# Altium PCB PCB1.PcbDoc
Units mm, origin at the board's own origin, x right, y up, seen from the top; angles counter-clockwise.
Board outline 82.4 x 82.4 mm, 2 copper layers (Top Layer, Bottom Layer); 55 components, 37 nets, 188 pads, 11 vias.
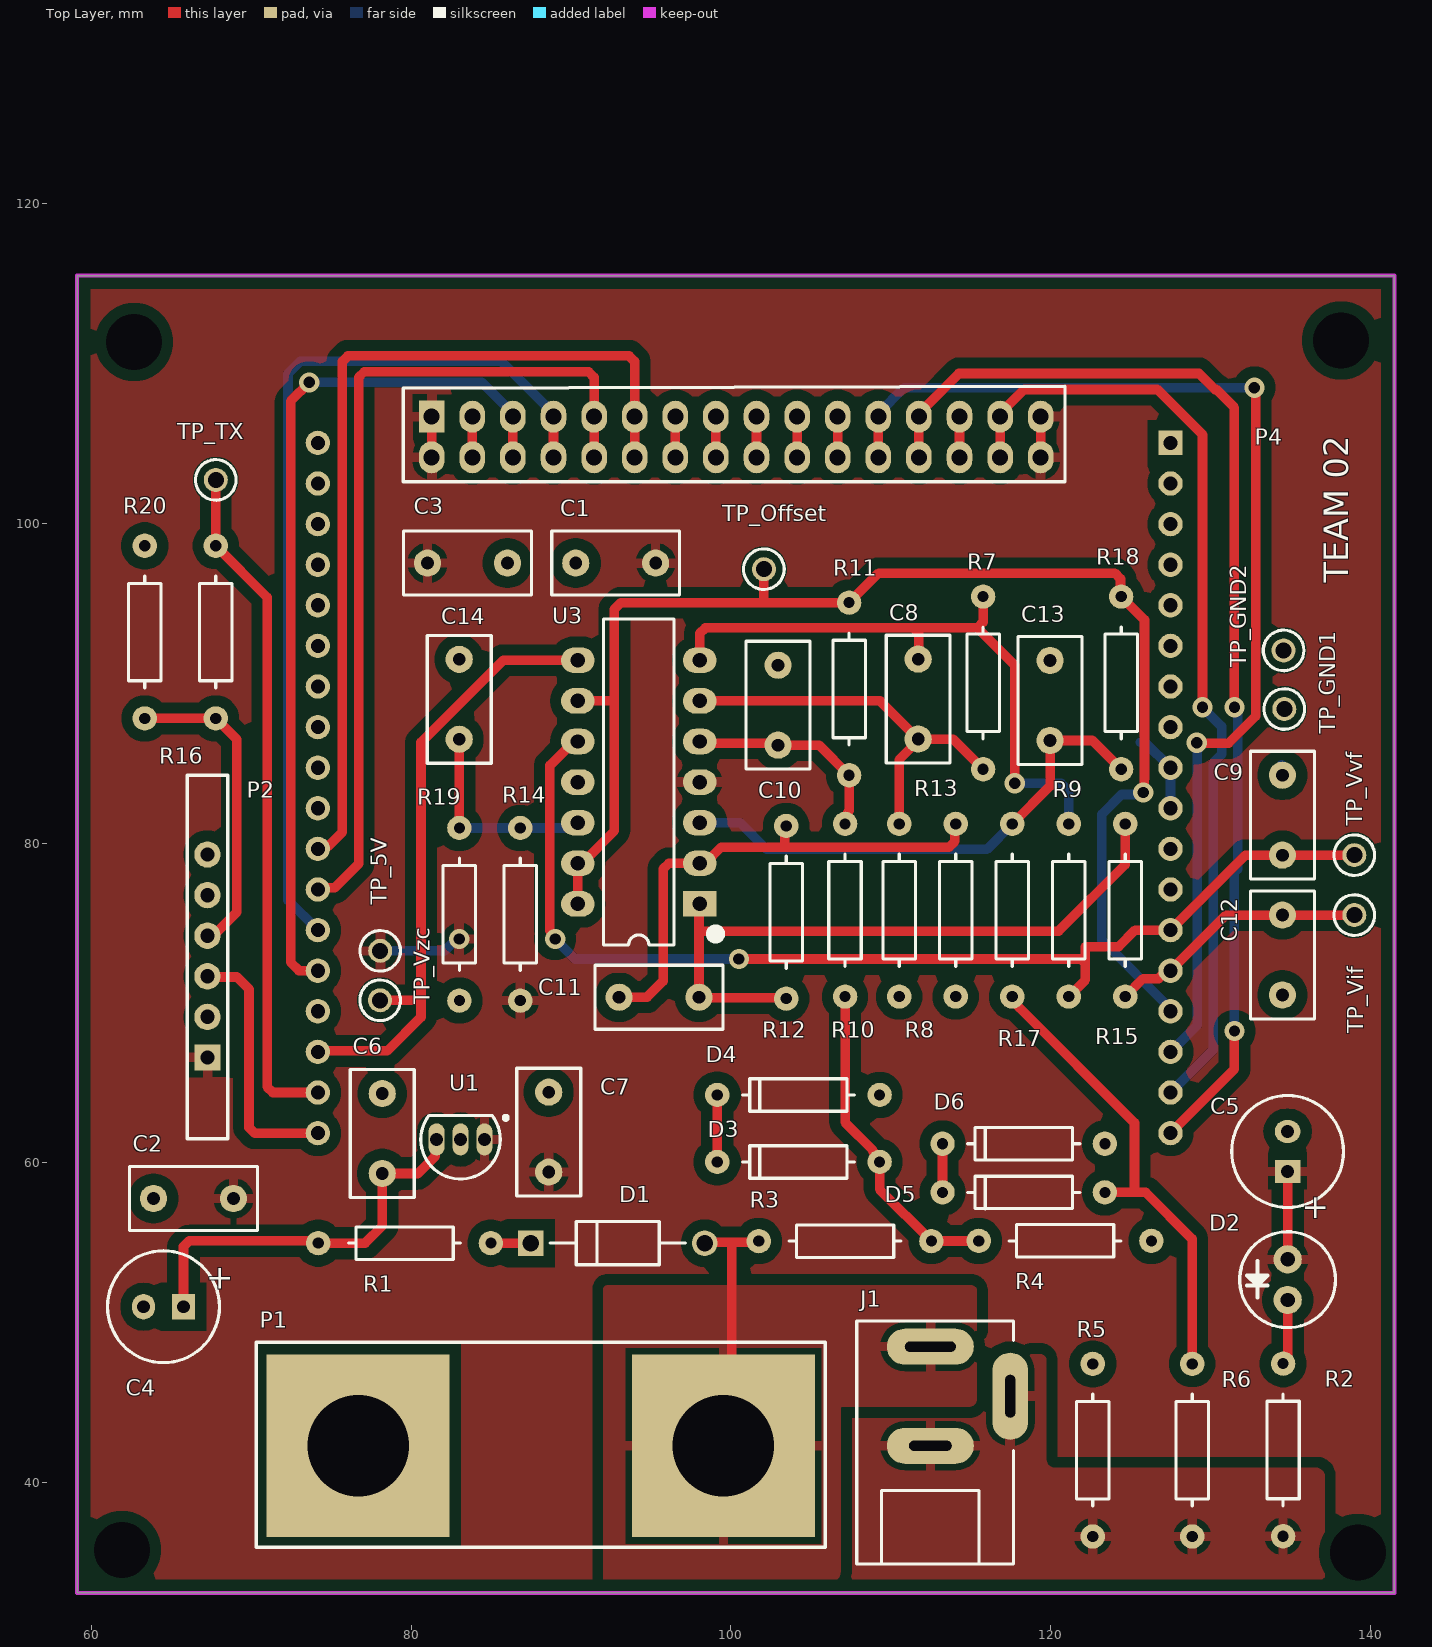
[diagram p0: Top Layer view]
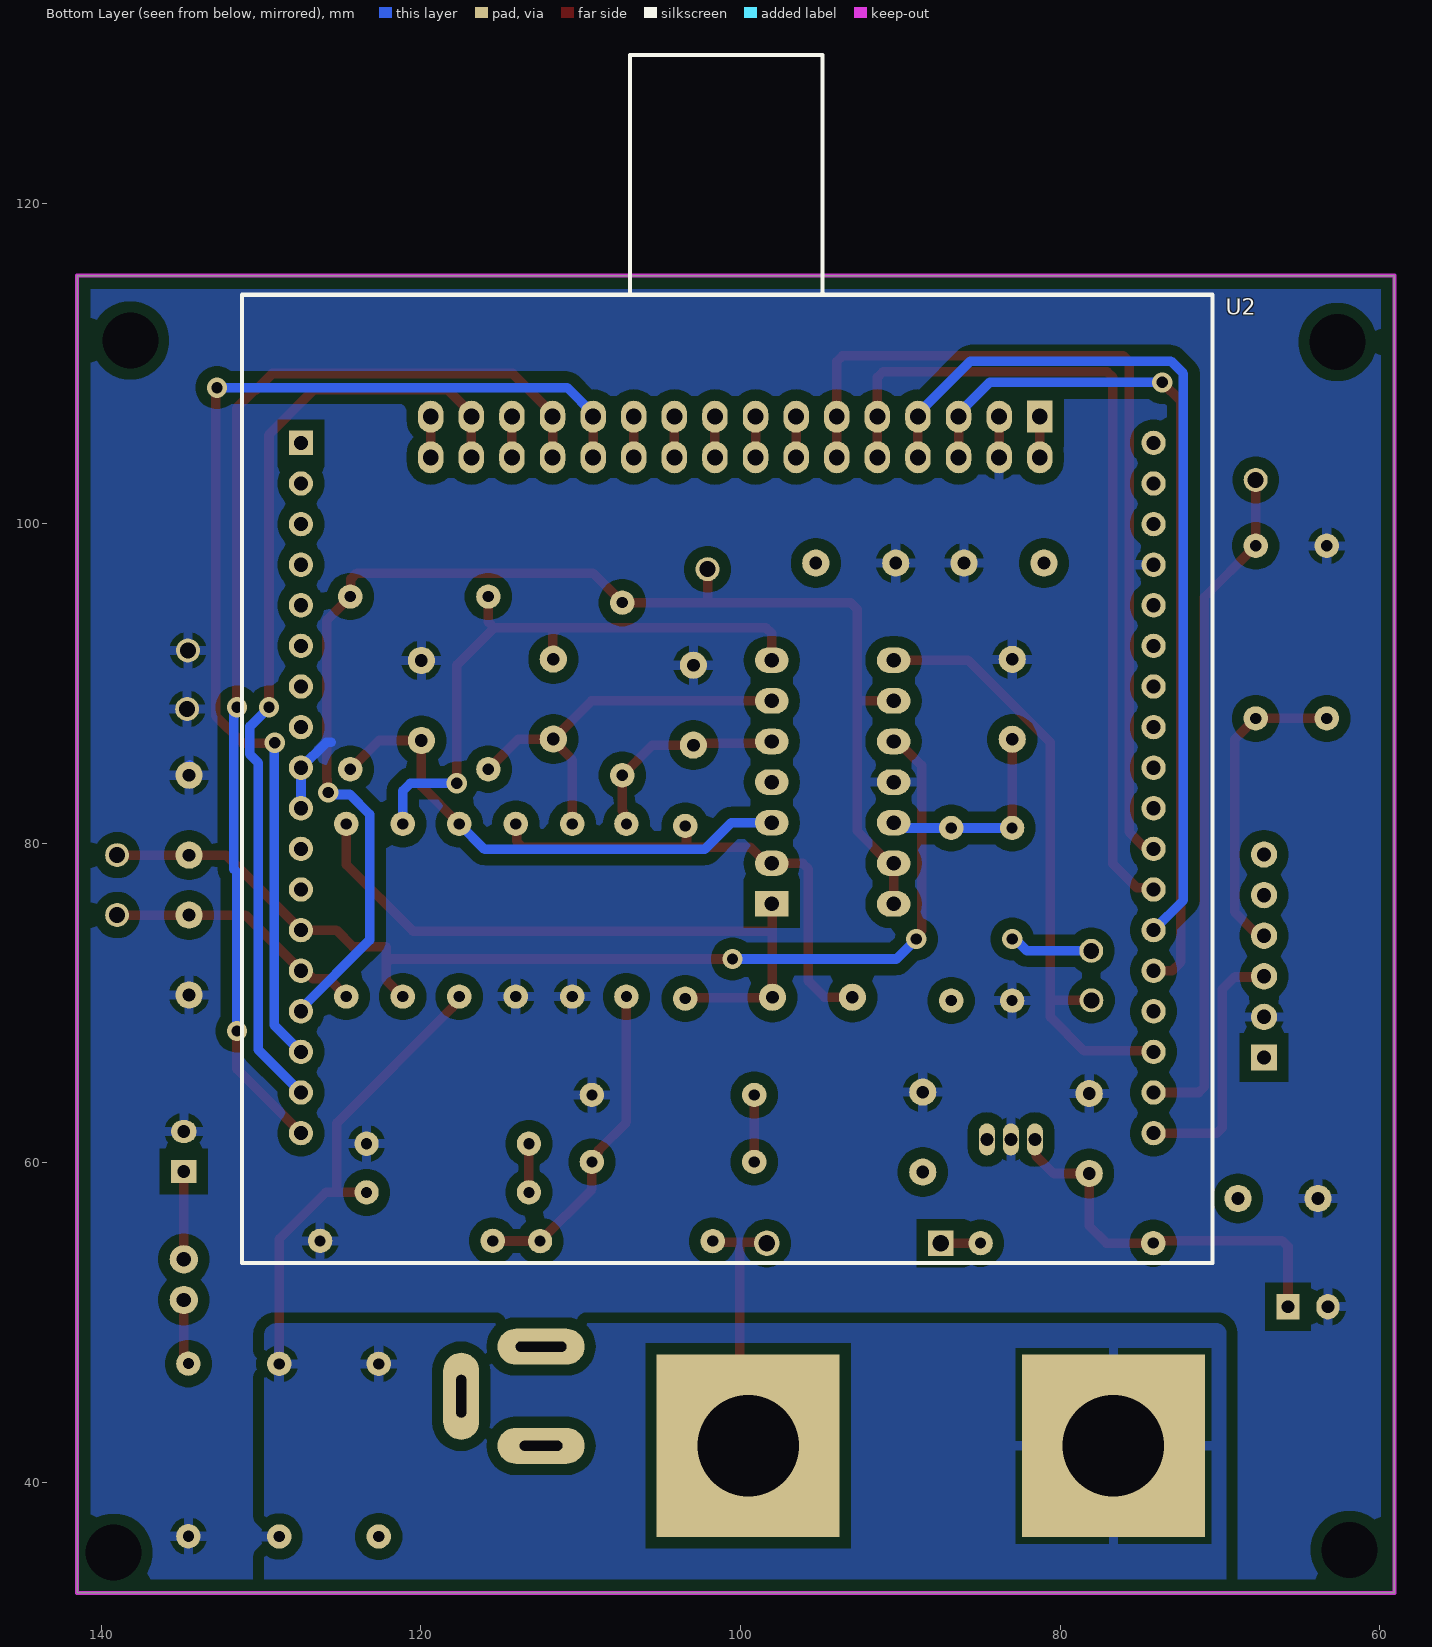
[diagram p1: Bottom Layer view, seen from below]

## Layer stack, top to bottom
Top Solder: solder mask 0.0102, Solder Resist, Dk 3.5
Top Layer: signal copper 0.0356
Dielectric 1: dielectric 0.32, FR-4, Dk 4.8
Bottom Layer: signal copper 0.0356
Bottom Solder: solder mask 0.0102, Solder Resist, Dk 3.5

## Board outline
59.1,33.1 59.1,115.5 141.5,115.5 141.5,33.1

## Design rules (kind name [scope] priority, off if disabled: settings)
Clearance Clearance_1 [All vs InPolygon] p1: gap=0.7 ignorepadtopadclearanceinfootprint=FALSE
Clearance [All] p2: gap=0.4 ignorepadtopadclearanceinfootprint=FALSE
Height [All] p1: minheight=0 maxheight=200 prefheight=12.7
HoleSize [All] p1: absolutevalues=TRUE maxlimit=10 minlimit=0.4 maxpercent=80.000 minpercent=20.000
PolygonConnect [All] p1: connectstyle=Relief reliefconductorwidth=0.6 reliefentries=4 polygonreliefangle="90 Angle" airgapwidth=0.4
RoutingVias [All] p1: holewidth=0.711 width=1.27 viastyle="Through Hole" minholewidth=0.711 minwidth=1.27 maxholewidth=0.711 maxwidth=1.27
SilkToSilkClearance [All] p1: silktosilkclearance=0.1
SilkToSolderMaskClearance [IsPad] p1: minsilkscreentomaskgap=0.1 clearancetoexposedcopper=TRUE
SolderMaskExpansion [All] p1: expansion=0.102 istentingtop=FALSE
SupplyNets "Schematic Supply Nets_25" [InNet('Vrect')] p1: voltage=0.000
SupplyNets "Schematic Supply Nets_24" [InNet('DS4')] p2: voltage=0.000
SupplyNets "Schematic Supply Nets_23" [InNet('DS3')] p3: voltage=0.000
SupplyNets "Schematic Supply Nets_22" [InNet('RX')] p4: voltage=0.000
SupplyNets "Schematic Supply Nets_21" [InNet('DS2')] p5: voltage=0.000
SupplyNets "Schematic Supply Nets_20" [InNet('Vmeas')] p6: voltage=0.000
SupplyNets "Schematic Supply Nets_19" [InNet('Vzc')] p7: voltage=0.000
SupplyNets "Schematic Supply Nets_18" [InNet('LED2')] p8: voltage=0.000
SupplyNets "Schematic Supply Nets_17" [InNet('Offset')] p9: voltage=0.000
SupplyNets "Schematic Supply Nets_16" [InNet('SH_DS')] p10: voltage=0.000
SupplyNets "Schematic Supply Nets_15" [InNet('GND')] p11: voltage=0.000
SupplyNets "Schematic Supply Nets_14" [InNet('SH_ST')] p12: voltage=0.000
SupplyNets "Schematic Supply Nets_13" [InNet('SRCLR')] p13: voltage=0.000
SupplyNets "Schematic Supply Nets_12" [InNet('Isensp')] p14: voltage=0.000
SupplyNets "Schematic Supply Nets_11" [InNet('OE')] p15: voltage=0.000
SupplyNets "Schematic Supply Nets_10" [InNet('SH_CP')] p16: voltage=0.000
SupplyNets "Schematic Supply Nets_9" [InNet('Imeas')] p17: voltage=0.000
SupplyNets "Schematic Supply Nets_8" [InNet('TX')] p18: voltage=0.000
SupplyNets "Schematic Supply Nets_7" [InNet('DS1')] p19: voltage=0.000
SupplyNets "Schematic Supply Nets_6" [InNet('LED1')] p20: voltage=0.000
SupplyNets "Schematic Supply Nets_5" [InNet('Vin')] p21: voltage=0.000
SupplyNets "Schematic Supply Nets_4" [InNet('Vsensp')] p22: voltage=0.000
SupplyNets "Schematic Supply Nets_3" [InNet('LED3')] p23: voltage=0.000
SupplyNets "Schematic Supply Nets_1" [InNet('LED4')] p24: voltage=0.000
SupplyNets "Schematic Supply Nets" [InNet('5V')] p25: voltage=0.000
Width [All] p1: maxlimit=10 minlimit=0.4 preferedwidth=0.6
26 further rules are at their usual default settings.

## Components (designator, comment, footprint, x,y, rotation, side; value= is the part's Value field where it differs from the comment)
C1 "*" CCAP-5P0 92.79,97.521 r180 top
C2 "*" CCAP-5P0 66.374,57.77 r180 top
C3 "*" CCAP-5P0 83.519,97.521 r0 top
C4 "*" "CAP-RAD-2.5mm Pitch" 64.5,51 r180 top
C5 "*" "CAP-RAD-2.5mm Pitch" 134.827,60.711 r90 top
C6 "*" CCAP-5P0 78.185,61.834 r90 top
C7 "*" CCAP-5P0 88.599,61.922 r90 top
C8 "*" CCAP-5P0 111.713,89.012 r270 top
C9 "*" CCAP-5P0 134.5,81.75 r90 top
C10 "*" CCAP-5P0 102.95,88.631 r90 top
C11 "*" CCAP-5P0 95.504,70.358 r180 top
C12 "*" CCAP-5P0 134.5,73 r270 top
C13 "*" CCAP-5P0 119.968,88.925 r90 top
C14 "*" CCAP-5P0 83,89 r90 top
D1 "1N4007" 1N4007-MFG 92.917,54.976 r0 top
D2 "Green" LED 134.827,52.69 r270 top
D3 "BZX79-CXVX" AXIAL-Zener-0.4 104.22,60.056 r180 top
D4 "BZX79-CXVX" AXIAL-Zener-0.4 104.22,64.247 r180 top
D5 "BZX79-CXVX" AXIAL-Zener-0.4 118.317,58.151 r180 top
D6 "BZX79-CXVX" AXIAL-Zener-0.4 118.317,61.199 r180 top
J1 "DC barrel jack" AC-Socket 112.475,42.499 r90 top value=socket
P1 "Dual Banana Plugs" "Dual Banana Plug" 88.1,42.3 r180 top
P2 "BLE Module Header" HM10_HDR1X6 67.25,66.59 r90 top
P4 "Display" Display 99.06,105.41 r180 top
R1 "*" AXIAL-0.4 79.582,54.976 r180 top
R2 "" AXIAL-0.4 134.544,42.037 r270 top
R3 "" AXIAL-0.4 107.141,55.103 r180 top value=100k
R4 "" AXIAL-0.4 120.904,55.118 r180 top value=1k
R5 "" AXIAL-0.4 122.635,42.022 r90 top value=1
R6 "" AXIAL-0.4 128.858,42.022 r90 top value=1
R7 "*" AXIAL-0.4 115.777,90.028 r270 top
R8 "*" AXIAL-0.4 110.528,75.804 r90 top
R9 "*" AXIAL-0.4 121.132,75.804 r270 top
R10 "*" AXIAL-0.4 107.141,75.804 r90 top
R11 "*" AXIAL-0.4 107.395,89.647 r90 top
R12 "*" AXIAL-0.4 103.458,75.677 r90 top
R13 "*" AXIAL-0.4 114.063,75.804 r90 top
R14 "*" AXIAL-0.4 86.821,75.55 r90 top
R15 "*" AXIAL-0.4 124.667,75.804 r270 top
R16 "*" AXIAL-0.4 67.771,93.203 r270 top
R17 "*" AXIAL-0.4 117.598,75.804 r90 top
R18 "*" AXIAL-0.4 124.413,90.028 r90 top
R19 "*" AXIAL-0.4 83.011,75.55 r270 top
R20 "*" AXIAL-0.4 63.326,93.203 r90 top
TP_5V "5003" TP_TH 78.058,73.264 r90 top
TP_GND1 "5003" TP_TH 134.62,88.392 r90 top
TP_GND2 "5003" TP_TH 134.573,92.06 r90 top
TP_Offset "5003" TP_TH 102.061,97.14 r90 top
TP_TX "5003" TP_TH 67.771,102.728 r90 top (schematic designator TP_Tx)
TP_Vif "5003" TP_TH 139,75.5 r90 top
TP_Vvf "5003" TP_TH 139,79.25 r90 top
TP_Vzc "5003" TP_TH 78.052,70.169 r90 top
U1 "L78L05ACZ" TO-92 83.082,61.468 r90 top
U2 "ATmega328PB Xplained Mini Header" "ATmeg328P Xplained" 100.83,83.45 r180 bottom
U3 "LM324" DIP-14 94.234,83.82 r180 top

## Footprints (in the part's own frame and the unit in brackets; to place one, negate y for a bottom-side part, rotate by r counter-clockwise, add the part's x,y. Pads: shape width x height; smd on the part's side, far side on the other; paste and mask are expansions set on the pad)
1N4007-MFG [mm]
  round 1.6 hole 1.05 paste-2539.97 mask+0: 1(5.438,0)
  rect 1.6x1.6 hole 1.05 paste-2539.97 mask+0: 2(-5.438,0)
  silkscreen extent -4.24,-1.35 4.24,1.35, body extent -6.34,-1.45 6.34,1.45, height 0.25
AC-Socket [mm]
  oval 2.25x5.45 hole 0.635 slot 3.175 at 90 deg: 1(6,0)
  oval 5.45x2.25 hole 0.635 slot 2.667 at 0 deg: 2(2.9,-5)
  oval 2.25x5.45 hole 0.635 slot 2.667 at 90 deg: 3(-0.2,0)
  silkscreen extent -7.6,-5.2 7.6,4.6, body extent -6.7,-5 6,4.2, height 10.5
"ATmeg328P Xplained" [mil]
  rect 60x60 hole 35: 1(-1050,850)
  round 60 hole 35: 2(-1050,750) 3(-1050,650) 4(-1050,550) 5(-1050,450) 6(-1050,350) 7(-1050,250) 8(-1050,150) 9(-1050,50) 10(-1050,-50) 11(-1050,-150) 12(-1050,-250) 13(-1050,-350) 14(-1050,-450) 15(-1050,-550) 16(-1050,-650) 17(-1050,-750) 18(-1050,-850) 19(1050,-850) 20(1050,-750) 21(1050,-650) 22(1050,-550) 23(1050,-450) 24(1050,-350) 25(1050,-250) 26(1050,-150) 27(1050,-50) 28(1050,50) 29(1050,150) 30(1050,250) 31(1050,350) 32(1050,450) 33(1050,550) 34(1050,650) 35(1050,750) 36(1050,850)
  silkscreen extent -1195,-1169 1195,1805, body extent -1201,-1150 1161,1845, height 452
AXIAL-0.4 [mm]
  round 1.524 hole 0.7: 1(-5.4,0) 2(5.4,0)
  silkscreen extent -3.5,-1.02 3.5,1.02, body extent -5.7,-1.3 5.7,1.3, height 2.7
AXIAL-Zener-0.4 [mil]
  round 60 hole 27.56: 1(-200,0) 2(200,0)
  silkscreen extent -138,-40 138,40, body extent -211,-52 211,52, height 92
"CAP-RAD-2.5mm Pitch" [mm] "Cap 6.3 X 11.2"
  rect 1.45x1.6 hole 0.8: 1(-1.25,0)
  oval 1.45x1.6 hole 0.8: 2(1.25,0)
  silkscreen extent -3.5,-3.5 3.5,3.5, body extent -3.15,-3.15 3.15,3.15, height 11.5
CCAP-5P0 [mm]
  round 1.7 hole 0.8: 1(-2.5,0) 2(2.5,0)
  silkscreen extent -4,-2 4,2, body extent -3.25,-1.5 3.25,1.5, height 6.5
DIP-14 [mm] "DIP; 14 Leads; Row Spacing 7.62 mm; Pitch 2.54 mm"
  rect 2.1x1.6 hole 0.9: 1(-3.81,7.62)
  oval 2.1x1.6 hole 0.9: 2(-3.81,5.08) 3(-3.81,2.54) 4(-3.81,0) 5(-3.81,-2.54) 6(-3.81,-5.08) 7(-3.81,-7.62) 8(3.81,-7.62) 9(3.81,-5.08) 10(3.81,-2.54) 11(3.81,0) 12(3.81,2.54) 13(3.81,5.08) 14(3.81,7.62)
  silkscreen extent -5.1,-10.2 2.2,10.2, body extent -5.07,-10.2 5.09,10.12, height 9.47
Display [mm]
  rect 1.6x2 hole 1: 1(17.78,-1.27)
  oval 1.6x2 hole 1: 2(17.78,1.27) 3(15.24,-1.27) 4(15.24,1.27) 5(12.7,-1.27) 6(12.7,1.27) 7(10.16,-1.27) 8(10.16,1.27) 9(7.62,-1.27) 10(7.62,1.27) 11(5.08,-1.27) 12(5.08,1.27) 13(2.54,-1.27) 14(2.54,1.27) 15(0,-1.27) 16(0,1.27) 17(-2.54,-1.27) 18(-2.54,1.27) 19(-5.08,-1.27) 20(-5.08,1.27) 21(-7.62,-1.27) 22(-7.62,1.27) 23(-10.16,-1.27) 24(-10.16,1.27) 25(-12.7,-1.27) 26(-12.7,1.27) 27(-15.24,-1.27) 28(-15.24,1.27) 29(-17.78,-1.27) 30(-17.78,1.27) 31(-20.32,-1.27) 32(-20.32,1.27)
  silkscreen extent -21.84,-3.18 19.56,2.79, body extent -32.6,-50 26.4,4, height 13
"Dual Banana Plug" [mm] "Connector; 2 Position"
  rect 11.43x11.43 hole 6.35: 1(-11.43,0) 2(11.43,0)
  silkscreen extent -17.8,-6.48 17.8,6.35, body extent -17.38,-5.99 17.43,5.99, height 5.5
HM10_HDR1X6 [mil] "Connector; Header; 6 Position"
  rect 65x65 hole 35.43: 1(0,0)
  round 65 hole 35.43: 2(100,0) 3(200,0) 4(300,0) 5(400,0) 6(500,0)
  silkscreen extent -200,-50 695,50, body extent -142,-39 571,228, height 1843
LED [mil]
  round 70 hole 35.43: 1(-50,0) 2(50,0)
  silkscreen extent -118,-118 118,118, body extent -98,-98 98,98, height 413
TO-92 [mm] "TO, Flat Index; 3 In-Line, Axial Leads; Body Dia. 4.5mm; Leads 0.51 x 0.48 mm (max)"
  oval 2x1 hole 0.8: 1(0,-1.5) 2(0,0) 3(0,1.5)
  silkscreen extent -2.48,-2.96 1.5,2.48, body extent -2.4,-2.4 1.53,2.4, height 6.73
TP_TH [mm] "Test Point, Through Hole, Dia 2.54mm"
  round 1.5 hole 1: 1(0,0)
  silkscreen extent -1.27,-1.27 1.27,1.27, body extent -1.27,-1.27 1.27,1.27, height 4.57

## Part data
C1 C2 C3 C6 C7 C8 C9 C10 C11 C12 C13 C14: library part CerCap_TH_5P0, "TH ceramic capacitor with 5mm pitch"
C4 C5: library part ElecCap_TH_2P0, "Electrolytic capacitor with radial package, 2mm pitch and 5.2mm diameter", LatestRevisionDate=17-Jul-2002, LatestRevisionNote="Re-released for DXP Platform.", PackageDescription="Polarized Capacitor; 2 Leads", PackageReference=POLAR0.8, Published=8-Jun-2000, Publisher="Altium Limited"
D1: library part 1N4007_TH_4AX0, "1N4007 1000V standard axial diode", Supplier Part Number 1=1N4007RLGOSCT-ND, ComponentLink1Description=https://www.fairchildsemi.com/datasheets/1N/1N914.pdf, ComponentLink1URL=https://www.fairchildsemi.com/datasheets/1N/1N914.pdf, Supplier 1=Digi-Key
D2: library part LED_TH_2P54, "Typical throughole GaAs LED with 2.54mm pitch", Manufacturer="Generic Components", Class I=Optoelectronic, Class II=LED, Published=8-Jun-2000, Publisher="Altium Limited", Revision="July-2002: Re-released for DXP Platform."
D3 D4 D5 D6: library part Zener_TH_4AX0, "Axial zener diode BZX79 series", Manufacturer="Nexperia USA Inc.", Manufacturer Part Number=BZX79-C4V7,143, Operating Temperature="-65°C ~ 200°C", Package / Case="DO-204AH, DO-35, Axial", Supplier Device Package=DO-35, Supplier Part Number 1=1727-1864-1-ND, Tolerance=±5%, Category="Discrete Semiconductor Products", ComponentLink1Description=https://assets.nexperia.com/documents/data-sheet/BZX79.pdf, ComponentLink1URL=https://assets.nexperia.com/documents/data-sheet/BZX79.pdf, Mounting Type="Through Hole", Packaging="Cut Tape (CT)", Part Status=Active, Pricing 1="1=0.23, 10=0.206, 100=0.1123, 500=0.06912, 1000=0.04714 (NZD)", RoHS="RoHS Compliant", Stock 1=8933, Supplier 1=Digi-Key
J1: library part AC_Input, "DC barrel jack connection to AC source"
P1: library part AC_Output, "Dual banana plugs connection to the AC load", LatestRevisionDate=17-Jul-2002, LatestRevisionNote="Re-released for DXP Platform.", Publisher="Altium Limited"
P2: library part BLEModule_TH, "2.54mm pitch 6-pin header for BLE module", LatestRevisionDate=17-Jul-2002, LatestRevisionNote="Re-released for DXP Platform.", Publisher="Altium Limited"
P4: "16-Pin Header Connecting Display"
R1 R2 R3 R4 R5 R6 R7 R8 R9 R10 R11 R12 R13 R14 R15 R16 R17 R18 R19 R20: library part Res_TH_0AX4, "Through hole resistor", ComponentLink1Description=http://www.royalohm.com/pdf/product2017/PrecisionMetalMF.pdf, LatestRevisionDate=17-Jul-2002, LatestRevisionNote="Re-released for DXP Platform.", PackageReference=AXIAL-0.4, Published=8-Jun-2000, Publisher="Altium Limited"
TP_5V TP_GND1 TP_GND2 TP_Offset TP_TX TP_Vif TP_Vvf TP_Vzc: library part TestPoint, "Test Point, Orange, 1-Pin THD, RoHS", Forward Current="3 A", Forward Voltage="1.08 V", Max Operating Temperature="150 degC", Max Surge Current="80 A", Min Operating Temperature="-65 degC", Package Quantity=500, Peak Reverse Current="600 uA", ComponentLink1Description="Manufacturer URL", ComponentLink1URL=http://www.keyelco.com/, ComponentLink2Description=Datasheet, ComponentLink2URL=http://keyelco.com/userAssets/file/M65p56.pdf, DatasheetVersion=Jun-15, Diameter="5.3 mm", Height="0.25 inch", Length="9.5 mm", Mount="Through Hole", PackageDescription="1-Pin Through Hole Device, Dia 2.54 mm", PackageReference=5003, Packaging=Bulk, Pins=2, Radiation Hardening=No, REACH SVHC="No SVHC", RoHSCompliant=true, Weight="0.01 lb", Width="0.25 inch"
U1: library part L78L05_TH_TO92, "Voltage Regulator 5V", Base Part Number=LM78L05, Current - Output=100mA, Manufacturer="ON Semiconductor", Manufacturer Part Number=LM78L05ACZX, Operating Temperature="-40°C ~ 125°C", Package / Case="TO-226-3, TO-92-3 (TO-226AA) (Formed Leads)", Supplier Device Package=TO-92-3, Supplier Part Number 1=LM78L05ACZXCT-ND, Voltage - Input (Max)=30V, Voltage - Output (Max)=-, Voltage - Output (Min/Fixed)=5V, Category="Integrated Circuits (ICs)", ComponentLink1Description=https://www.fairchildsemi.com/datasheets/MC/MC78L05A.pdf, ComponentLink1URL=https://www.fairchildsemi.com/datasheets/MC/MC78L05A.pdf, Control Features=-, Mounting Type="Through Hole", Output Configuration=Positive, Output Type=Fixed, Packaging="Cut Tape (CT)", Part Status=Active, Pricing 1="1=0.69, 10=0.517, 100=0.3226, 500=0.2207, 1000=0.16976 (NZD)", Protection Features="Over Temperature, Short Circuit", PSRR="80dB (120Hz)", RoHS="RoHS Compliant", Stock 1=7782, Supplier 1=Digi-Key, Voltage Dropout (Max)=-
U2: library part ATmega328PBXplained_TH, "Dual 18-pin headers connecting to ATmega328PB Xplained Mini", Manufacturer="Microchip Technology", Manufacturer Part Number=ATMEGA328PB-XMINI, Operating System=-, Supplier Part Number 1=ATMEGA328PB-XMINI-ND, Board Type="Evaluation Platform", Category="Development Boards, Kits, Programmers", ComponentLink1Description=http://www.microchip.com/mymicrochip/filehandler.aspx?ddocname=en589665, ComponentLink1URL=http://www.microchip.com/mymicrochip/filehandler.aspx?ddocname=en589665, Contents=Board(s), Core Processor=AVR, For Use With/Related Products=ATmega328P, Mounting Type=Fixed, Part Status=Active, Platform="ATmega328P Xplained Mini", Pricing 1="1=15.11 (NZD)", RoHS="RoHS Compliant", Stock 1=454, Supplier 1=Digi-Key, Type="MCU 8-Bit"
U3: library part LM324N_TH_DIP16, "IC OPAMP GP 14DIP", Current - Supply=1mA, Manufacturer="ON Semiconductor", Manufacturer Part Number=LM324N, Operating Temperature="0°C ~ 70°C", Package / Case="14-DIP (0.300\", 7.62mm)", Supplier Device Package=14-DIP, Supplier Part Number 1=LM324NFS-ND, Voltage - Supply, Single/Dual (±)="3 V ~ 32 V, ±1.5 V ~ 16 V", Amplifier Type="General Purpose", Base Part Number=LM324, Category="Integrated Circuits (ICs)", ComponentLink1Description=https://www.fairchildsemi.com/datasheets/LM/LM2902.pdf, ComponentLink1URL=https://www.fairchildsemi.com/datasheets/LM/LM2902.pdf, Mounting Type="Through Hole", Output Type=-, Packaging=Tube, Part Status=Active, Pricing 1="1=0.9, 10=0.775, 100=0.5789, 500=0.45482, 1000=0.35145 (NZD)", RoHS="RoHS Compliant", Slew Rate=-, Stock 1=2900, Supplier 1=Digi-Key

## Free pads (board coordinates)
  round 1.524 hole 3.5: 1(62.662,111.354) 2(138.176,111.455) 3(61.9,35.789) 4(139.217,35.611)

## Via types
v1: diameter 1.27, hole 0.711, Top Layer to Bottom Layer, 11 vias

## Nets (pads, with @x,y where several pads share a name; then routed paths per layer and width w, separated by ;. In a path a pad name is that pad's centre, name@x,y a point inside that pad or via, vN(x,y) a via of type N, cw(c..) or ccw(c..) an arc to the next point about the centre after c; other vN are vias at no path point)
5V: C1.1 C2.1 C3.1 C5.1 C7.1 D2.1 P2.1 P4.1 P4.2 P4.31 P4.32 R14.1 TP_5V.1 U1.1 U3.4 | length 15.8
  Top Layer w0.6: P4.2 P4.1 ; P4.32 P4.31 ; D2.1 C5.1
  Bottom Layer w0.6: TP_5V.1 82.083,73.264 82.819,74 v1(83,74)
DS1: P4.5 P4.6 U2.23 | length 55
  Top Layer w0.6: v1(73.625,108.825) 72.452,107.652 72.452,72.548 72.98,72.02 U2.23 ; P4.6 P4.5
  Bottom Layer w0.6: v1(73.625,108.825) 84.415,108.825 86.36,106.88 P4.5
DS2: P4.7 P4.8 U2.24 | length 56.6
  Top Layer w0.6: P4.8 P4.7
  Bottom Layer w0.6: U2.24 72.29,76.43 72.29,109.378 73.072,110.16 85.62,110.16 88.9,106.88 P4.7
DS3: P4.9 P4.10 U2.25 | length 53.7
  Top Layer w0.6: U2.25 74.265,77.205 75.205,77.205 76.708,78.708 76.708,109.139 77.059,109.49 91.089,109.49 91.44,109.139 P4.9 P4.10
DS4: P4.11 P4.12 U2.26 | length 56
  Top Layer w0.6: U2.26@74.4,79.4 74.4,79.63 74.587,79.817 74.817,79.817 75.692,80.692 75.692,110.139 76.043,110.49 93.629,110.49 93.98,110.139 P4.11 P4.12
GND: C1.2 C2.2 C3.2 C4.2 C5.2 C6.2 C7.2 C9.2 C10.2 C12.2 C13.2 C14.2 D4.1 D6.1 J1.2 J1.3 P2.2 P4.3 P4.4 R2.2 R4.1 R5.1 R6.1 R8.1 R13.1 R19.2 R20.2 TP_GND1.1 TP_GND2.1 U1.2 U2.9 U2.10 U2.33 U3.11 | length 8.5
  Top Layer w0.6: P4.4 P4.3
  Bottom Layer w0.6: 125.603,86.309 125.911,86.309 U2.9 U2.10 U2.10@127.29,82.18 ; C9.2@134.453,84.914 134.707,84.66 C9.2@134.707,84.362
Imeas: C12.1 R15.2 TP_Vif.1 U2.14 | length 16.4
  Top Layer w0.6: R15.2 125.783,71.52 126.75,71.52 127.25,72.02 U2.14 130.98,75.5 C12.1 TP_Vif.1
Isensp: D5.1 P1.2 R5.2 R6.2 R17.1 | length 29.9
  Top Layer w0.6: R17.1 117.598,70.154 118.047,69.704 118.047,69.703 125.25,62.5 125.25,58.151 ; D5.1 125.25,58.151 ; R6.2 128.858,55.243 125.951,58.151 125.25,58.151
LED1: P4.13 P4.14 | length 2.5
  Top Layer w0.6: P4.14 P4.13
LED2: P4.15 P4.16 | length 2.5
  Top Layer w0.6: P4.16 P4.15
LED3: P4.17 P4.18 | length 2.5
  Top Layer w0.6: P4.18 P4.17
LED4: P4.19 P4.20 | length 2.5
  Top Layer w0.6: P4.20 P4.19
NetC8_1: C8.1 R7.1 R9.1 U3.7 | length 39.8
  Top Layer w0.6: U3.7 98.044,93.121 98.395,93.472 111.409,93.472 ; C8.1 111.76,91.559 111.76,93.121 111.409,93.472 ; R7.1 115.777,93.823 115.426,93.472 ; v1(117.75,83.75) 117.75,91.148 115.426,93.472 ; 111.409,93.472 115.426,93.472
  Bottom Layer w0.6: v1(117.75,83.75) 120.649,83.75 121.132,83.266 R9.1
NetC8_2: C8.2 R7.2 R8.2 U3.6 | length 25.3
  Top Layer w0.6: U3.6 109.325,88.9 C8.2 ; R8.2 110.528,85.222 111.713,86.408 C8.2 ; R7.2 113.893,86.512 C8.2
NetC10_1: C10.1 R10.2 R11.1 U3.5 | length 13.4
  Top Layer w0.6: U3.5 98.159,86.245 102.836,86.245 C10.1 105.511,86.131 R11.1 107.395,82.017 107.318,81.94 107.318,81.381 R10.2
NetC11_1: C11.1 R12.1 R15.1 U3.1 | length 42.3
  Top Layer w0.6: U3.1 98.004,76.16 98.004,74.5 ; R12.1 103.418,70.317 98.045,70.317 C11.1 98.004,74.5 ; R15.1 124.667,78.667 120.5,74.5 98.004,74.5
NetC11_2: C11.2 R12.2 R13.2 U3.2 | length 31.6
  Top Layer w0.6: C11.2 93.016,70.37 94.754,70.37 95.758,71.374 95.758,78.389 96.109,78.74 98.383,78.74 99.385,79.742 103.378,79.742 ; R12.2 103.378,80.997 103.378,79.742 ; R13.2 114.009,81.15 114.009,80.107 113.643,79.742 103.378,79.742
NetC13_1: C13.1 R17.2 R18.1 U3.3 | length 32.3
  Top Layer w0.6: R17.2 119.968,83.575 C13.1 122.616,86.425 R18.1
  Bottom Layer w0.6: U3.3 100.577,81.28 102.242,79.615 116.009,79.615 R17.2
NetC14_1: C14.1 R14.2 R19.1 U3.12 | length 13.2
  Top Layer w0.6: R19.1 83.011,86.385 C14.1@83.138,86.512
  Bottom Layer w0.6: R19.1 89.573,80.95 89.903,81.28 U3.12
NetD1_2: D1.2 R1.1 | length 2.5
  Top Layer w0.6: R1.1 D1.2
NetD2_2: D2.2 R2.1 | length 4
  Top Layer w0.6: R2.1@134.827,47.422 D2.2
NetD3_2: D3.2 D4.2 | length 4.2
  Top Layer w0.6: D3.2 D4.2
NetD5_2: D5.2 D6.2 | length 3
  Top Layer w0.6: D5.2 D6.2
NetP2_4: P2.4 R16.2 R20.1 | length 19.3
  Top Layer w0.6: R20.1 R16.2 69.089,86.485 69.089,75.693 P2.4@67.564,74.168
OE: P4.27 P4.28 | length 2.5
  Top Layer w0.6: P4.28 P4.27
Offset: R11.2 R18.2 TP_Offset.1 U2.15 U3.9 U3.13 U3.14 | length 88
  Top Layer w0.6: U3.14 U3.13 90.674,78.74 92.71,80.776 92.71,88.9 ; U3.9 92.71,88.9 ; TP_Offset.1 102.061,95.094 102.108,95.047 ; v1(125.794,83.173) 125.858,83.237 125.858,84.005 125.875,84.022 125.875,93.966 124.373,95.468 124.373,96.538 124.022,96.89 109.238,96.89 R11.2 102.108,95.047 ; 92.71,88.9 92.71,94.645 93.112,95.047 102.108,95.047
  Bottom Layer w0.6: v1(125.794,83.173) 125.666,83.045 124.44,83.045 123.205,81.809 123.205,73.933 127.5,69.639 U2.15
RX: P2.3 U2.19 | length 15.7
  Top Layer w0.6: P2.3@67.564,71.628 69.088,71.628 69.85,70.866 69.85,62.211 70.201,61.86 U2.19
SH_CP: P4.23 P4.24 U2.16 | length 72
  Top Layer w0.6: P4.24 P4.23 ; v1(129.134,86.284) 129.167,86.25 131.138,86.25 132.835,87.947 132.835,108.415 v1(132.75,108.5)
  Bottom Layer w0.6: P4.23 109.22,106.88 110.84,108.5 v1(132.75,108.5) ; U2.16 129.165,68.605 129.165,86.252 v1(129.134,86.284)
SH_DS: P4.29 P4.30 U2.17 | length 60.2
  Top Layer w0.6: P4.30 P4.29 116.84,106.88 118.34,108.38 126.674,108.38 129.5,105.554 v1(129.5,88.5)
  Bottom Layer w0.6: U2.17 130.165,67.065 130.165,85.027 130.697,85.559 130.697,87.303 v1(129.5,88.5)
SH_ST: P4.25 P4.26 U2.18 | length 71.6
  Top Layer w0.6: P4.26 P4.25 111.76,106.88 114.26,109.38 129.284,109.38 130.284,108.38 130.37,108.38 131.5,107.25 v1(131.5,88.5) ; U2.18 131.5,65.86 v1(131.5,68.25)
  Bottom Layer w0.6: v1(131.5,68.25) 131.5,78.178 131.697,78.375 131.697,88.122 131.5,88.319 v1(131.5,88.5)
SRCLR: P4.21 P4.22 | length 2.7
  Top Layer w0.6: P4.22 P4.21
  Bottom Layer w0.6: P4.21 P4.21@106.68,106.88
TX: R16.1 TP_TX.1 U2.20 | length 42.8
  Top Layer w0.6: TP_TX.1 R16.1 70.988,95.386 70.988,64.751 71.34,64.4 U2.20@74.322,64.4
Vin: D1.1 J1.1 P1.1 R3.2 | length 16
  Top Layer w0.6: D1.1 98.419,55.039 100.048,55.039 ; P1.1@99.748,42.719 P1.1@100.11,42.357 ; P1.1@100.048,43.019 100.048,55.039 ; R3.2 101.678,55.039 100.048,55.039
Vmeas: C9.1 R9.2 TP_Vvf.1 U2.13 U3.10 | length 69.9
  Top Layer w0.6: v1(89,74) 89,74.181 88.674,74.507 88.674,84.86 90.174,86.36 U3.10 ; v1(100.5,72.75) 121.903,72.75 122.171,72.482 ; R9.2 122.171,71.443 122.171,72.482 ; TP_Vvf.1 C9.1 132.19,79.25 U2.13 125.289,74.56 124.25,73.521 122.171,73.521 122.171,72.75 122.171,72.482
  Bottom Layer w0.6: v1(89,74) 90.25,72.75 v1(100.5,72.75)
Vrect: C4.1 C6.1 R1.2 U1.3 | length 25.3
  Top Layer w0.6: C4.1@65.75,50.712 65.75,54.767 66.101,55.118 74.04,55.118 R1.2 77.104,54.976 78.185,56.057 C6.1 80.416,59.334 81.505,60.423 81.505,61.391 U1.3
Vsensp: D3.1 R3.1 R4.2 R10.1 | length 20.5
  Top Layer w0.6: R10.1 107.141,62.531 108.883,60.789 108.883,60.723 109.3,60.306 109.3,58.344 R3.1 112.549,55.11 115.496,55.11 R4.2
Vzc: TP_Vzc.1 U2.21 U3.8 | length 39.3
  Top Layer w0.6: U2.21@73.885,67 78.5,67 80.611,69.111 80.611,70.05 ; TP_Vzc.1 80.492,70.169 80.611,70.05 ; U3.8 85.748,91.44 80.611,86.304 80.611,70.05
pads on no net: P2.5 P2.6 U2.1 U2.2 U2.3 U2.4 U2.5 U2.6 U2.7 U2.8 U2.11 U2.12 U2.22 U2.27 U2.28 U2.29 U2.30 U2.31 U2.32 U2.34 U2.35 U2.36

## Polygon pours and split planes (outlines as drawn)
5V on Top Layer "5V_L01_P012" (solid, remove dead copper, pour order 12): 59.106,115.494 141.503,115.494 141.503,33.103 cw(c141.496,33.103) 141.496,33.096 59.106,33.096
GND on Top Layer "GND_L01_P009" (solid, pour order 9): 107.29,34.061 107.29,44.094 cw(c107.798,44.094) 107.798,44.602 115.501,44.602 ccw(c115.501,44.9) 115.799,44.9 115.799,47.65 cw(c116.18,47.65) 116.18,48.031 119.355,48.031 cw(c119.355,47.65) 119.736,47.65 119.736,41.437 ccw(c120.254,41.437) 120.254,40.919 136.627,40.919 cw(c136.627,40.411) 137.135,40.411 137.135,34.061 cw(c136.5,34.061) 136.5,33.426 107.925,33.426 cw(c107.925,34.061)
Vin on Top Layer "VIN_L01_P008" (solid, pour order 8): 92.024,33.934 92.024,52.095 cw(c92.278,52.095) 92.278,52.349 115.011,52.349 cw(c115.011,51.968) 115.392,51.968 115.392,45.237 cw(c114.884,45.237) 114.884,44.729 106.909,44.729 ccw(c106.909,44.704) 106.883,44.704 106.883,34.569 cw(c105.867,34.569) 105.867,33.553 92.405,33.553 cw(c92.405,33.934)
GND on Bottom Layer "GND_L02_P011" (solid, remove dead copper, pour order 11): 59.233,115.367 141.376,115.367 141.376,33.223 59.207,33.223
Isensp on Bottom Layer "ISENSP_L02_P010" (solid, pour order 10): 70.244,49.962 129.045,49.962 cw(c129.045,49.2) 129.807,49.2 129.807,33.96 cw(c129.172,33.96) 129.172,33.325 70.117,33.325 cw(c70.117,33.833) 69.609,33.833 69.609,49.327 cw(c70.244,49.327)

## Keep-outs
Keep-Out Layer:
  the board outline again, w0.254

## Silkscreen, mask and mechanical layers (free items; w line width, h text height)
Top Overlay:
  text "TEAM 02" at 138.624,96.301 h1.52 r90
Mechanical 1:
  lines w0.254: 59.106,115.492 59.106,33.096 141.503,33.096 ; 59.106,115.494 141.503,115.494 141.503,33.098

## Text inside footprints (layer, text, board x,y; h text height)
C4: Top Overlay "+" at 68.9,53.4 h1.5 r180
C5: Top Overlay "+" at 137.227,56.311 h1.5 r90